# EAGLE board RFM69PI (EAGLE 6.4)
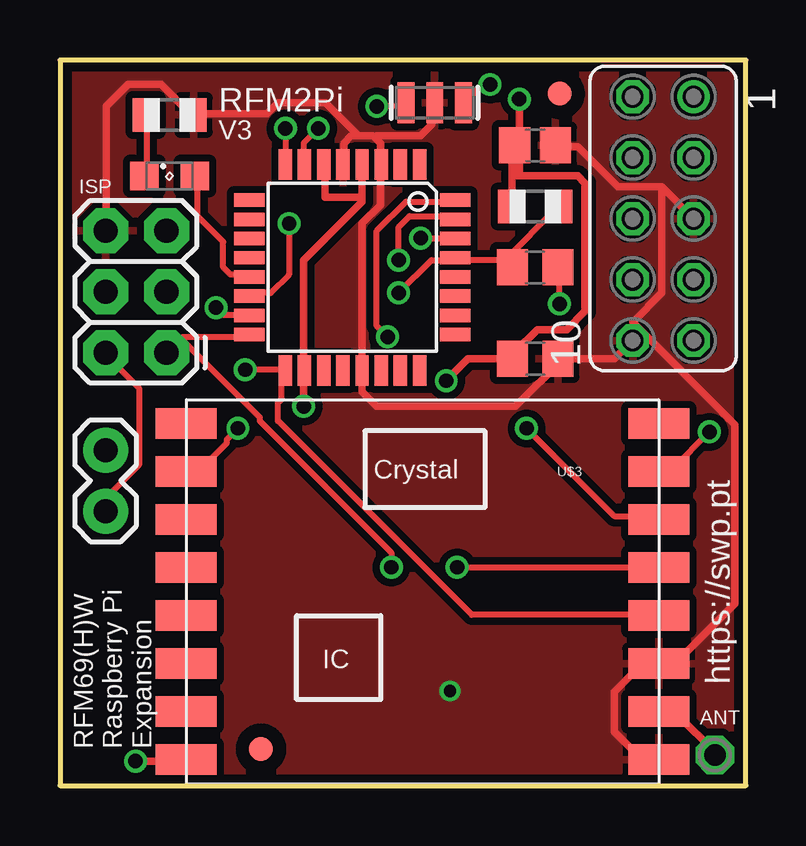
[diagram p0: board, top side]
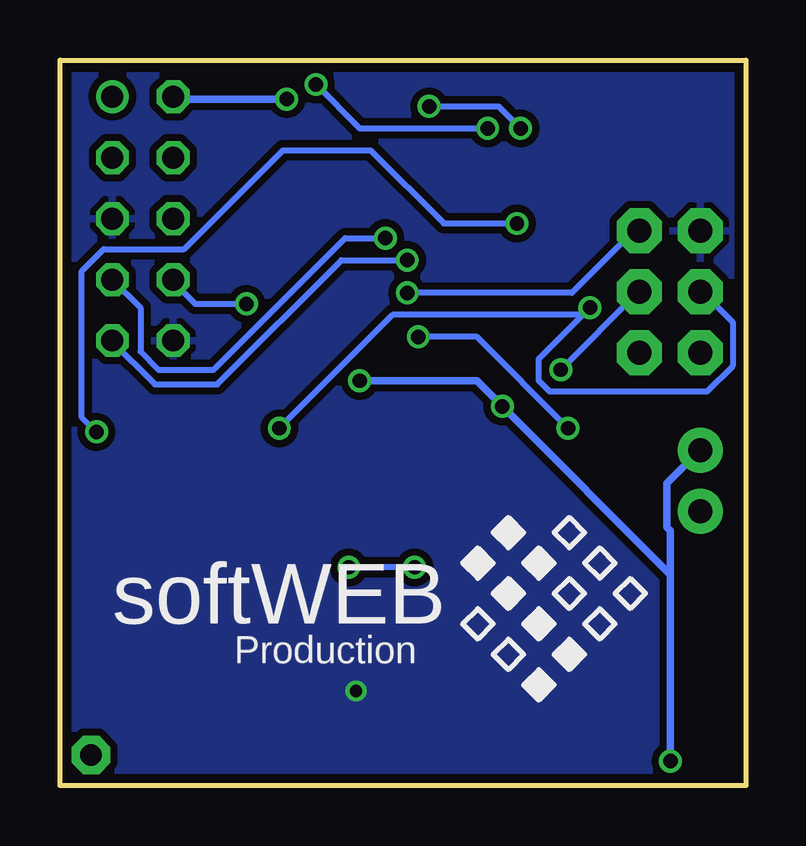
[diagram p1: board, bottom side, seen from below]

Size 28.6 x 30.23 mm. Coordinates in mm from the lower left corner, seen from the top.
Outline: 0,30.23 0,0 28.6,0 28.6,30.23 0,30.23
Copper layers (1*16): Top 0.0356mm / dielectric 1.5011mm / Bottom 0.0356mm
Design rules "LaenPCBOrder *": minimum track width 6mil, minimum drill 13mil, track to track 6mil, track to pad 6mil, pad to pad 6mil, via to via 6mil, smd to smd 6mil, copper to edge 15mil, drill to drill 6mil, minimum pad ring 7mil, minimum via ring 7mil, stop-mask expansion 4mil, vias tented up to drill 50mil, thermal gap 10mil
Net classes: 0 default: width 0.254 mm, drill 0.254 mm, clearance 0.254 mm; 1 power: width 0.305 mm, drill 0.305 mm, clearance 0.305 mm

## Footprints (pad centres in the part's own frame; a part is rotated, then mirrored left to right if it is on the bottom)
1,6/0,8 = drill 0.9 pad 1.6 octagon: 1 0,0
C0805 = smd 1.3 x 1.5: 1 -0.95,0; 2 0.95,0
C0805' = smd 1.3 x 1.5: 1 -0.85,0; 2 0.85,0
2X3 = drill 1.016 pad 1.88 octagon: 1 0,0; 2 0,2.54; 3 2.54,0; 4 2.54,2.54; 5 5.08,0; 6 5.08,2.54
1X02 = drill 1.016 pad 1.88: 1 0,0; 2 2.54,0
SML0805 = smd 1.2 x 1.2: A 1.05,0; C -1.05,0
R0805 = smd 1.1 x 1.4: 1 -1,0; 2 1,0
FE05-2 = drill 0.914: 1 -5.08,1.27 | drill 0.914 octagon: 2 -5.08,-1.27; 3 -2.54,1.27; 4 -2.54,-1.27; 5 0,1.27; 6 0,-1.27; 7 2.54,1.27; 8 2.54,-1.27; 9 5.08,1.27; 10 5.08,-1.27
TQFP32-08 = smd 1.27 x 0.559: 1 -4.293,2.8; 2 -4.293,2; 3 -4.293,1.2; 4 -4.293,0.4; 5 -4.293,-0.4; 6 -4.293,-1.2; 7 -4.293,-2; 8 -4.293,-2.8; 17 4.293,-2.8; 18 4.293,-2; 19 4.293,-1.2; 20 4.293,-0.4; 21 4.293,0.4; 22 4.293,1.2; 23 4.293,2; 24 4.293,2.8 | smd 0.559 x 1.27: 9 -2.8,-4.293; 10 -2,-4.293; 11 -1.2,-4.293; 12 -0.4,-4.293; 13 0.4,-4.293; 14 1.2,-4.293; 15 2,-4.293; 16 2.8,-4.293; 25 2.8,4.293; 26 2,4.293; 27 1.2,4.293; 28 0.4,4.293; 29 -0.4,4.293; 30 -1.2,4.293; 31 -2,4.293; 32 -2.8,4.293
FIDUCIAL_1MM = smd 1 x 1: 1 0,0
RFM69SMD = smd 2.54 x 1.27: 1 -10.1,6.7; 2 -10.1,4.7; 3 -10.1,2.7; 4 -10.1,0.7; 5 -10.1,-1.3; 6 -10.1,-3.3; 7 -10.1,-5.3; 8 -10.1,-7.3; 9 9.6,-7.3; 10 9.6,-5.3; 11 9.6,-3.3; 12 9.6,-1.3; 13 9.6,0.7; 14 9.6,2.7; 15 9.6,4.7; 16 9.6,6.7
RESONATOR-SMD = smd 0.7 x 1.7: 1 -1.2,0; 2 0,0; 3 1.2,0

## Placement (x,y rotation side)
ANT  [1,6/0,8]  27.3,1.27 0 top
C4  0.1uF  [C0805]  19.81,17.78 0 top
C5  0.1uF  [C0805]  19.81,21.59 180 top
C7  0.1uF  [C0805']  19.81,26.67 0 top
ISP  AVR_SPI_PRG_6PTH  [2X3]  4.45,18.03 90 top
JP1  [1X02]  1.9,11.43 90 top
LED1  [SML0805]  4.57,25.4 0 top
R1  10K  [R0805]  19.81,24.13 180 top
RASPBERRY_PI  [FE05-2]  25.15,23.62 270 top
RLED  220R  [R0805]  4.57,27.94 180 top
U2  ATMEGA168  [TQFP32-08]  12.19,21.59 270 top
U$1  FIDUCIAL  [FIDUCIAL_1MM]  20.83,28.83 0 top
U$2  FIDUCIAL  [FIDUCIAL_1MM]  8.38,1.52 0 top
U$3  RFM69  [RFM69SMD]  15.37,8.38 0 top
Y1  16MHz  [RESONATOR-SMD]  15.62,28.45 180 top

## Library data of the parts
ANT = JeeLabs
C4 C5 = rcl
C7 = resistor
ISP JP1 U2 = SparkFun
LED1 = led
R1 RLED U$1 U$2 = adafruit
RASPBERRY_PI = con-lsta; OC_FARNELL: unknown; OC_NEWARK: unknown
U$3 = SWP
Y1 = SparkFun-FreqCtrl; PROD_ID: XTAL-08900

## Nets
+3V3 [power]: C4.1 C7.1 JP1.2 R1.2 RASPBERRY_PI.2 U2.4 U2.6 U2.18 U$3.8
+5V: ISP.2 JP1.1
_RESET: C5.1 RASPBERRY_PI.8
A0: U2.23
A1: U2.24
A2: U2.25
A3: U2.26
A4/SDA: U2.27
A5/SCL: U2.28
A6: U2.19
A7: U2.22
ANT [power]: ANT.1 U$3.10
D0/RX: RASPBERRY_PI.7 U2.30
D1/TX: RASPBERRY_PI.9 U2.31
D2: U2.32 U$3.2
D3: U2.1
D4: U2.2
D5: U2.9
D6: U2.10
D7: U2.11
D8: U2.12
D9: LED1.A U2.13
D10: U2.14 U$3.15
D11/MOSI: ISP.4 U2.15 U$3.14
D12/MISO: ISP.1 U2.16 U$3.13
D13/SCK: ISP.3 U2.17 U$3.12
GND [power]: C4.2 C7.2 ISP.6 RASPBERRY_PI.5 RASPBERRY_PI.10 RLED.1 U2.3 U2.5 U2.21 U$3.9 U$3.11 Y1.2
N$1: U2.7 Y1.1
N$2: U2.8 Y1.3
N$3: LED1.C RLED.2
NC: U$3.16
RESET: C5.2 ISP.5 R1.1 U2.29

## Tracks (layer width: path | path; a pad name or v marks a point on that pad's centre or on a via)
+3V3  (via drill 0.6)
  Top 0.305: 18.85,25.4 18.85,26.62 C7.1 | 18.85,25.4 18.85,24.18 R1.2 | 18.85,25.4 19.15,25.4 | 19.15,25.4 21.59,25.4 21.89,25.09 21.89,19.76 21.13,19 19.91,19 19,18.09 19,17.78 C4.1 17.02,17.78 v16.1,16.87 | 19.15,25.4 v19.15,28.6 | 12.6,24.51 12.6,25.86 U2.4 | 12.6,24.51 12.6,24.33 10.16,21.89 10.16,17.32 U2.18 10.16,17.17 v10.16,15.8 | v3.15,1.02 5.13,1.02 U$3.8 | U2.6 11.05,25.88 11.05,24.51 12.6,24.51
  Bottom 0.305: v19.15,28.6 23.88,28.6 RASPBERRY_PI.2 | 3.15,8.79 3.15,10.62 3.3,10.77 3.3,12.6 1.93,13.97 JP1.2 | 3.15,8.79 v3.15,1.02 | 3.15,8.79 v10.16,15.8 11.23,16.87 v16.1,16.87
+5V
  Top 0.254: JP1.1 1.93,11.53 1.93,11.99 3.3,13.36 3.3,16.56 1.93,17.93 ISP.2
_RESET  (via drill 0.6)
  Top 0.254: v20.83,20.07 20.83,21.59 C5.1
  Bottom 0.254: v20.83,20.07 22.96,20.07 23.88,20.98 RASPBERRY_PI.8
ANT
  Top 0.305: U$3.10 25.1,3 25.71,3 27.38,1.32 ANT.1
D0/RX  (via drill 0.6)
  Top 0.254: v15.04,22.81 16.41,22.81 U2.30
  Bottom 0.254: v15.04,22.81 16.71,22.81 22.2,17.32 24.49,17.32 25.25,18.09 25.25,19.91 RASPBERRY_PI.7
D1/TX  (via drill 0.6)
  Top 0.254: v14.12,21.89 14.12,23.27 14.58,23.72 16.41,23.72 U2.31
  Bottom 0.254: v14.12,21.89 16.87,21.89 22.05,16.71 24.64,16.71 26.47,18.54 RASPBERRY_PI.9
D2  (via drill 0.6)
  Top 0.254: v13.66,18.69 13.21,19.15 13.21,23.11 14.43,24.33 16.41,24.33 U2.32 | v7.42,14.88 6.96,14.43 6.96,14.28 5.89,13.21 5.28,13.21 U$3.2
  Bottom 0.254: v13.66,18.69 11.23,18.69 v7.42,14.88
D9
  Top 0.254: LED1.A 5.74,25.4 5.74,23.72 6.81,22.66 6.81,21.59 7.11,21.29 7.87,21.29 U2.13
D10  (via drill 0.6)
  Top 0.254: v9.55,23.42 9.55,21.29 8.79,20.52 8.03,20.52 U2.14 | v27.08,14.73 25.55,13.21 25.1,13.21 U$3.15
  Bottom 0.254: v9.55,23.42 12.6,23.42 15.65,26.47 19.3,26.47 23.42,22.35 26.77,22.35 27.69,21.44 27.69,15.34 v27.08,14.73
D11/MOSI  (via drill 0.6)
  Top 0.254: v6.5,19.91 6.81,19.61 7.87,19.61 U2.15 | v19.46,14.88 23.11,11.23 24.94,11.23 U$3.14
  Bottom 0.254: 6.88,19.53 8.64,17.78 8.64,16.87 8.18,16.41 1.63,16.41 0.56,17.48 0.56,19.3 1.78,20.52 ISP.4 | 6.88,19.53 v6.5,19.91 | v19.46,14.88 14.73,19.61 6.96,19.61 6.88,19.53
D12/MISO  (via drill 0.6)
  Top 0.254: U2.16 7.87,18.69 5.13,18.69 4.52,18.09 ISP.1 5.13,18.54 8.33,15.34 8.33,15.19 13.82,9.7 v13.82,9.09 | v16.56,9.09 24.94,9.09 U$3.13
  Bottom 0.254: v13.82,9.09 v16.56,9.09
D13/SCK  (via drill 0.6)
  Top 0.254: U$3.12 24.94,7.11 17.17,7.11 9.09,15.19 9.09,15.95 9.25,16.1 9.25,17.17 U2.17 9.25,17.32 v7.72,17.32
  Bottom 0.254: v7.72,17.32 4.52,20.52 ISP.3
GND  (via drill 0.51 pad 0.25)
  Top 0.305: 12.45,27.08 13.06,27.08 13.13,27 | 12.45,27.08 12.14,27.08 11.84,26.77 11.84,26.01 U2.5 | 13.13,27 13.36,26.77 13.36,26.01 U2.3 13.36,25.86 13.36,24.18 12.6,23.42 12.6,17.32 U2.21 12.6,17.17 12.6,16.41 13.21,15.8 19,15.8 20.98,17.78 | 12.45,27.08 11.07,28.45 9.09,28.45 8.64,27.99 5.59,27.99 RLED.1 5.44,27.99 4.22,29.21 2.85,29.21 1.93,28.3 1.93,23.11 ISP.6 | Y1.2 15.49,28.45 15.49,27.53 15.04,27.08 13.21,27.08 13.13,27 | U$3.9 24.94,1.17 24.18,1.17 23.11,2.23 23.11,3.91 24.18,4.98 24.94,4.98 U$3.11 25.1,5.13 25.71,5.13 28.14,7.57 28.14,15.04 23.88,19.3 | 20.98,17.78 23.11,17.78 RASPBERRY_PI.10 23.88,19.3 | 20.98,17.78 C4.2 20.83,17.78 | RASPBERRY_PI.5 25.17,24.87 | 25.17,24.87 25.1,24.94 23.27,24.94 21.59,26.62 20.68,26.62 C7.2 | 23.88,19.3 25.1,20.52 25.1,24.79 25.17,24.87
  other vias: 16.26,3.94
  pour Bottom: 0,30.23 28.57,30.23 28.57,0 0,0
  pour Top: 0,30.23 28.57,30.23 28.57,0 0,0
N$1  (via drill 0.6)
  Top 0.254: v10.77,27.38 10.16,26.77 10.16,26.01 U2.7 | v17.93,29.21 17.63,29.21 16.87,28.45 Y1.1
  Bottom 0.254: v10.77,27.38 16.1,27.38 v17.93,29.21
N$2  (via drill 0.6)
  Top 0.254: v9.4,27.38 9.4,26.01 U2.8 | v13.21,28.3 14.12,28.3 14.27,28.45 Y1.3
  Bottom 0.254: v9.4,27.38 10.31,28.3 v13.21,28.3
N$3
  Top 0.254: LED1.C 3.61,25.4 3.61,27.84 RLED.2
RESET  (via drill 0.6)
  Top 0.254: 18.54,21.89 16.56,21.89 U2.29 16.41,21.89 15.49,21.89 v14.12,20.52 | 18.54,21.89 18.85,21.59 C5.2 18.54,21.89 | 18.54,21.89 20.68,24.03 R1.1
  Bottom 0.254: v14.12,20.52 7.26,20.52 4.67,23.11 ISP.5

## Text on the board
bPlace: softWEB | Production
_tsilk: RFM2Pi | V3 | https://swp.pt | RFM69(H)W / Raspberry Pi / Expansion